# Altium PCB PCB.PcbDoc
Units mm, origin at the board's own origin, x right, y up, seen from the top; angles counter-clockwise.
Board outline 152.4 x 101.6 mm, 2 copper layers (Top Layer, Bottom Layer); 23 components, 22 nets, 137 pads, 57 vias.
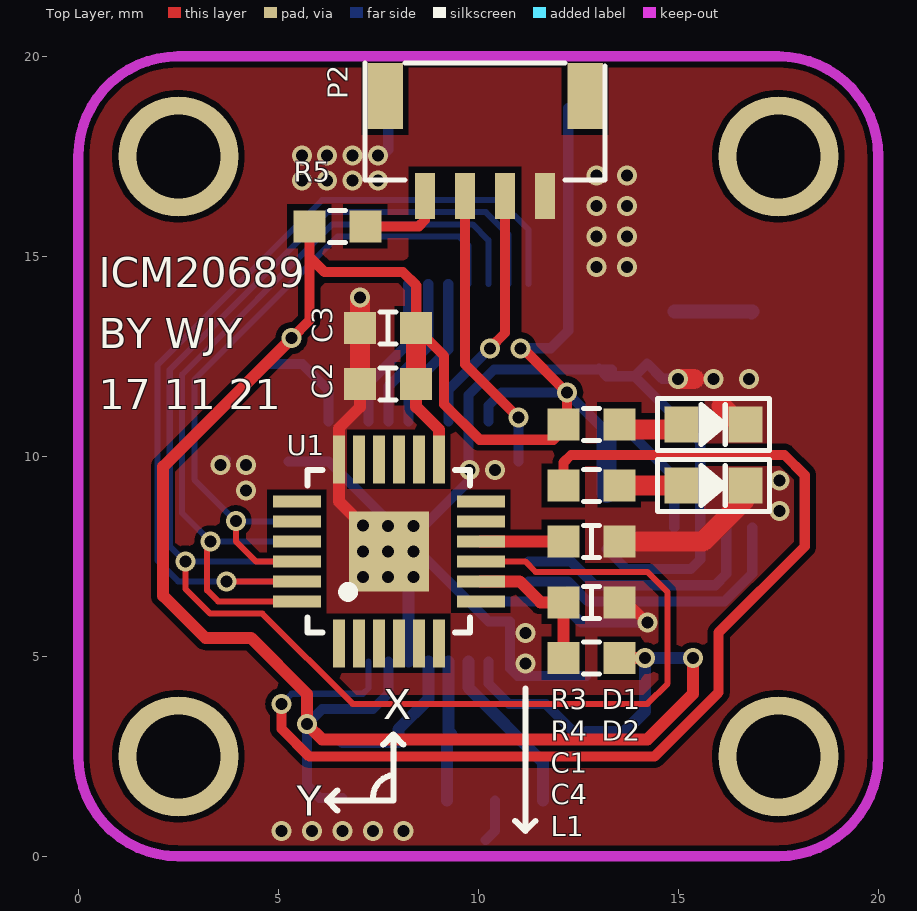
[diagram p0: Top Layer view]
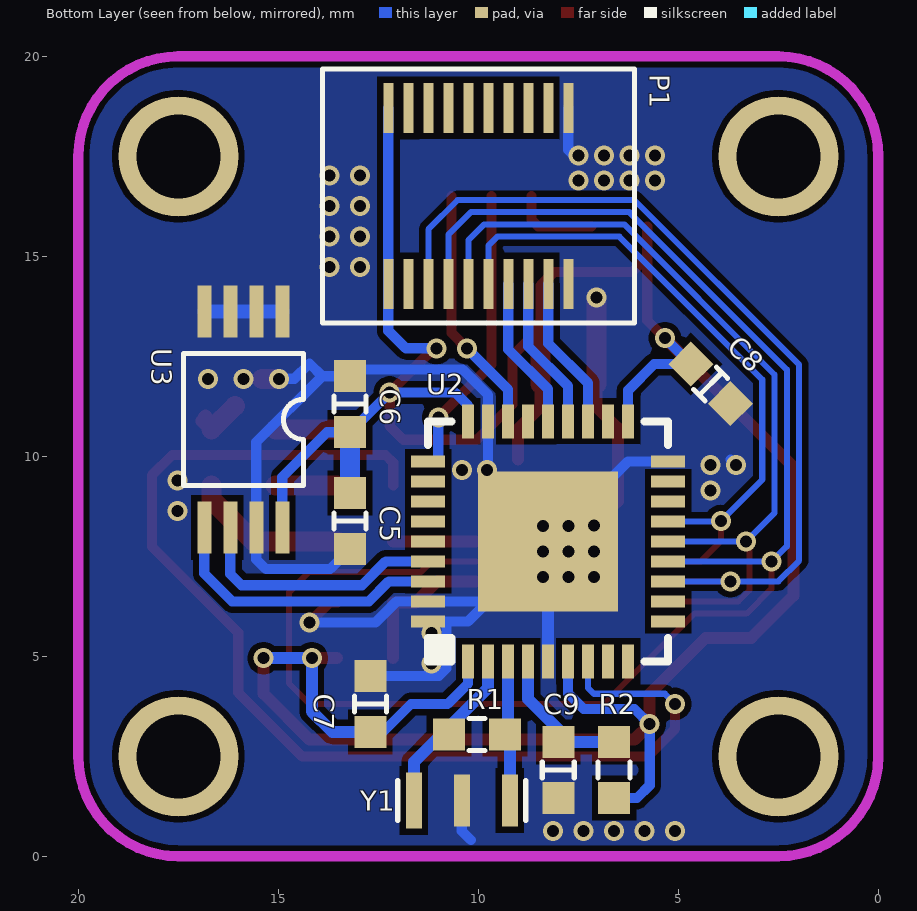
[diagram p1: Bottom Layer view, seen from below]

## Layer stack, top to bottom
Top Solder: solder mask 0.0102, Solder Resist, Dk 3.5
Top Layer: signal copper 0.0356
Dielectric 1: dielectric 0.32, FR-4, Dk 4.8
Bottom Layer: signal copper 0.0356
Bottom Solder: solder mask 0.0102, Solder Resist, Dk 3.5

## Board outline
-162.56,-6.604 -10.16,-6.604 -10.16,94.996 -162.56,94.996

## Design rules (kind name [scope] priority, off if disabled: settings)
Clearance [All] p1: gap=0.152
PlaneClearance [All] p1 off: clearance=0.508
PolygonConnect [All] p1: connectstyle=Direct reliefconductorwidth=0.254 reliefentries=4 polygonreliefangle="90 Angle" airgapwidth=0.254
RoutingVias [All] p1: holewidth=0.711 width=1.27 viastyle="Through Hole" minholewidth=0.254 minwidth=0.5 maxholewidth=0.711 maxwidth=1.27
SolderMaskExpansion [All] p1: expansion=0.102
Width [All] p1: maxlimit=2.54 minlimit=0.152 preferedwidth=0.254
29 further rules are at their usual default settings.

## Components (designator, comment, footprint, x,y, rotation, side; value= is the part's Value field where it differs from the comment)
C1 "Cap" c0603 12.827,7.874 r180 top
C2 "Cap" c0603 7.747,11.811 r180 top
C3 "Cap" c0603 7.747,13.208 r180 top
C4 "Cap" c0603 12.827,6.35 r180 top
C5 "Cap" C0603 13.208,8.382 r90 bottom
C6 "Cap" C0603 13.208,11.303 r270 bottom
C7 "Cap" C0603 12.7,3.81 r270 bottom
C8 "Cap" C0603 4.191,11.811 r45 bottom
C9 "Cap" C0603 8.001,2.159 r90 bottom
D1 "LED0" 0603D 15.875,10.795 r0 top
D2 "LED0" 0603D 15.875,9.271 r0 top
L1 "Inductors" r0603 12.827,4.953 r180 top
P1 "Header 10X2" 0.5_2x10P 10,16.51 r180 bottom
P2 "Header 4" 1.0*4PIN/SMD 8.668,16.51 r0 top
R1 "Res1" R0603 10.033,3.048 r0 bottom
R2 "Res1" R0603 6.604,2.159 r270 bottom
R3 "Res1" R0603 12.827,10.795 r180 top
R4 "Res1" R0603 12.827,9.271 r180 top
R5 "Res1" R0603 6.477,15.748 r0 top
U1 "ICM-20689" QFN24 7.761,7.624 r90 top locked
U2 "STM32F103T8U6" VFQFPN36 8.255,7.874 r90 bottom
U3 "AT24C16" TSSOP8 15.875,10.922 r270 bottom
Y1 "XTAL(3213)" Y3213 10.414,1.397 r90 bottom

## Footprints (in the part's own frame and the unit in brackets; to place one, negate y for a bottom-side part, rotate by r counter-clockwise, add the part's x,y. Pads: shape width x height; smd on the part's side, far side on the other; paste and mask are expansions set on the pad)
0.5_2x10P [mm]
  rect 0.25x1.25 smd: 1(-2.25,-2.2) 2(-2.25,2.2) 3(-1.75,-2.2) 4(-1.75,2.2) 5(-1.25,-2.2) 6(-1.25,2.2) 7(-0.75,-2.2) 8(-0.75,2.2) 9(-0.25,-2.2) 10(-0.25,2.2) 11(0.25,-2.2) 12(0.25,2.2) 13(0.75,-2.2) 14(0.75,2.2) 15(1.25,-2.2) 16(1.25,2.2) 17(1.75,-2.2) 18(1.75,2.2) 19(2.25,-2.2) 20(2.25,2.2)
  silkscreen extent -3.9,-3.18 3.9,3.18
1.0*4PIN/SMD [mm]
  rect 0.5x1.143 smd: 1(0,0) 2(1,0) 3(2,0) 4(3,0)
  rect 0.889x1.651 smd: 5(-1,2.5) 6(4,2.5)
  silkscreen extent -1.5,0.4 4.5,3.32
0603D [mm]
  rect 0.85x0.9 smd: 1(-0.8,0) 2(0.8,0)
  silkscreen extent -1.4,-0.65 1.4,0.65, body extent -0.85,-0.4 0.77,0.4, height 1.1
c0603 [mm] "C0603"
  rect 0.8x0.8 smd: 1(-0.7,0) 2(0.7,0)
  silkscreen extent -0.2,-0.4 0.2,0.4, body extent -0.75,-0.4 0.85,0.4, height 0.6
C0603 [mm] "C0603"
  rect 0.8x0.8 smd: 1(-0.7,0) 2(0.7,0)
  silkscreen extent -0.2,-0.4 0.2,0.4, body extent -0.75,-0.4 0.85,0.4, height 0.6
QFN24 [mm]
  rect 1.2x0.3 smd: 1(-2.3,1.25) 2(-2.3,0.75) 3(-2.3,0.25) 4(-2.3,-0.25) 5(-2.3,-0.75) 6(-2.3,-1.25) 13(2.3,-1.25) 14(2.3,-0.75) 15(2.3,-0.25) 16(2.3,0.25) 17(2.3,0.75) 18(2.3,1.25)
  rect 0.3x1.2 smd: 7(-1.25,-2.3) 8(-0.75,-2.3) 9(-0.25,-2.3) 10(0.25,-2.3) 11(0.75,-2.3) 12(1.25,-2.3) 19(1.25,2.3) 20(0.75,2.3) 21(0.25,2.3) 22(-0.25,2.3) 23(-0.75,2.3) 24(-1.25,2.3)
  rect 2x2 smd: 18(0,0)
  silkscreen extent -2.03,-2.03 2.03,2.03
r0603 [mm] "R0603"
  rect 0.8x0.8 smd: 1(-0.7,0) 2(0.7,0)
  silkscreen extent -0.2,-0.4 0.2,0.4, body extent -0.75,-0.4 0.85,0.4, height 0.6
R0603 [mm] "R0603"
  rect 0.8x0.8 smd: 1(-0.7,0) 2(0.7,0)
  silkscreen extent -0.2,-0.4 0.2,0.4, body extent -0.75,-0.4 0.85,0.4, height 0.6
TSSOP8 [mm]
  rect 1.3x0.35 smd: 1(-2.7,0.975) 2(-2.7,0.325) 3(-2.7,-0.325) 4(-2.7,-0.975) 5(2.7,-0.975) 6(2.7,-0.325) 7(2.7,0.325) 8(2.7,0.975)
  silkscreen extent -1.65,-1.5 1.65,1.5
VFQFPN36 [mm]
  rect 0.85x0.3 smd: 1(-3,2) 2(-3,1.5) 3(-3,1) 4(-3,0.5) 5(-3,0) 6(-3,-0.5) 7(-3,-1) 8(-3,-1.5) 9(-3,-2) 19(3,-2) 20(3,-1.5) 21(3,-1) 22(3,-0.5) 23(3,0) 24(3,0.5) 25(3,1) 26(3,1.5) 27(3,2)
  rect 0.3x0.85 smd: 10(-2,-3) 11(-1.5,-3) 12(-1,-3) 13(-0.5,-3) 14(0,-3) 15(0.5,-3) 16(1,-3) 17(1.5,-3) 18(2,-3) 28(2,3) 29(1.5,3) 30(1,3) 31(0.5,3) 32(0,3) 33(-0.5,3) 34(-1,3) 35(-1.5,3) 36(-2,3)
  rect 3.5x3.5 smd: 36(0,0)
  silkscreen extent -3,-3 3,3
Y3213 [mm]
  rect 1.4x0.4 smd: 1(0,1.2)
  rect 1.3x0.4 smd: 2(0,0) 3(0,-1.2)
  silkscreen extent -0.5,-1.6 0.5,1.6

## Part data
C1 C2 C3 C4 C5 C6 C7 C8 C9: "Capacitor"
D1 D2: "Typical INFRARED GaAs LED"
P1: "Header, 10-Pin, Dual row"
P2: "Header, 4-Pin"
R1 R2 R3 R4 R5: "Resistor"
Y1: "Crystal Oscillator"

## Free pads (board coordinates)
  round 3 hole 2.1: 0(2.5,2.5) 0(2.5,17.5) 0(17.5,2.5) 0(17.5,17.5)

## Via types
v1: diameter 0.5, hole 0.3, Top Layer to Bottom Layer, 57 vias

## Nets (pads, with @x,y where several pads share a name; then routed paths per layer and width w, separated by ;. In a path a pad name is that pad's centre, name@x,y a point inside that pad or via, vN(x,y) a via of type N, cw(c..) or ccw(c..) an arc to the next point about the centre after c; other vN are vias at no path point)
3.3V: C2.1 C3.1 C5.2 C6.2 C7.2 C8.2 L1.1 P1.1 P1.2 R2.2 R3.2 R5.1 U1.13 U2.1 U2.6 U2.19 U2.27 U3.8 | length 76.4
  Top Layer w0.254: v1(5.334,12.954) 5.777,13.397 5.777,14.986 ; R5.1 5.777,14.986 ; v1(11.049,12.7) 11.111,12.7 v1(12.214,11.597) 12.214,10.755 11.873,10.414 10.033,10.414 9.144,11.303 9.144,12.511 C3.1 8.447,14.274 8.116,14.605 6.158,14.605 5.777,14.986
  Top Layer w0.3: v1(5.334,12.954) 2.123,9.743 2.123,6.513 3.175,5.461 4.318,5.461 5.715,4.064 v1(5.715,3.302) 6.096,2.921 14.224,2.921 15.367,4.064 v1(15.367,4.953) ; C2.1 8.447,11.238 9.011,10.674 U1.13 ; L1.1 v1(14.163,4.953)
  Top Layer w0.5: C2.1 C3.1
  Bottom Layer w0.254: v1(5.334,12.954) C8.2 5.601,12.306 6.255,11.652 U2.19 ; R2.2 6.034,1.459 5.715,1.778 v1(5.715,3.302) 6.096,3.683 7.366,3.683 7.755,4.072 U2.6 ; U2.1 10.255,4.322 10.767,3.81 11.684,3.81 12.384,3.11 C7.2 ; U2.27 10.255,11.271 10.581,11.597 v1(12.214,11.597) C6.2 13.781,10.603 14.9,9.484 U3.8 ; v1(11.049,12.7) 11.811,12.7 12.25,13.139 P1.1 P1.2
  Bottom Layer w0.3: C7.2 13.651,3.11 14.163,3.622 v1(14.163,4.953) v1(15.367,4.953)
  Bottom Layer w0.5: C5.2 C6.2
3.3V_T: P2.1 R5.2 | length 2.2
  Top Layer w0.254: R5.2 8.509,15.748 8.668,15.907 P2.1
CS: P1.11 U1.22 U2.15 | length 16.9
  Top Layer w0.152: v1(3.937,8.382) 3.937,7.874 4.437,7.374 U1.22
  Bottom Layer w0.152: U2.15 3.945,8.374 v1(3.937,8.382) 2.902,9.417 2.902,11.919 6.477,15.494 9.525,15.494 9.75,15.269 P1.11
CS_STM32: P1.13 U2.23 | length 3.8
  Bottom Layer w0.254: U2.23 8.255,11.678 9.25,12.673 P1.13
GND: C1.1 C2.2 C3.2 C4.1 C5.1 C6.1 C7.1 C8.1 C9.1 D1.2 D2.2 P1.19 P1.20 P2.4 U1.18 U2.5 U2.18 U2.26 U2.35 U2.36 U3.1 U3.2 U3.3 U3.4 U3.7 Y1.2 | length 54.8
  Top Layer w0.254: C4.1 13.716,6.35 v1(14.224,5.842)
  Top Layer w0.3: C2.2 7.047,11.238 6.511,10.702 6.511,9.924 6.511,8.874 v1(7.112,8.273) U1.18@7.761,7.624
  Top Layer w0.35: D1.2@16.675,10.668 D1.2@16.891,10.884 ; D1.2 16.85,10.97 D1.2@16.826,10.994
  Top Layer w0.5: C2.2 C3.2 v1(7.047,13.97) ; C1.1 15.621,7.874 16.675,8.928 D2.2 ; v1(14.986,11.938) 15.405,11.938 ; 16.084,11.258 D1.2@16.675,10.668
  Bottom Layer w0.254: v1(3.556,9.779) v1@3.696,9.919 ; U2.18 6.255,9.874 U2.36@8.255,7.874 ; v1(7.493,17.526) 7.62,17.526 7.75,17.656 P1.20 ; 10.185,0.406 10.414,0.635 Y1.2 ; C7.1 10.984,4.51 10.795,4.699 10.795,5.874 10.255,5.874 U2.36@9.755,6.374 ; C6.1@13.019,12.192 C6.1@13.04,12.171 ; C5.1 13.706,7.184 15.312,7.184 15.55,7.422 U3.7 15.55,10.358 13.905,12.003 ; C6.1@13.335,12.171 C6.1@13.04,12.171 ; v1(14.224,5.842) 12.573,5.842 12.041,6.374 U2.35 U2.36@9.755,6.374 ; v1(14.986,11.938) 14.602,11.938 14.221,12.319 13.905,12.003 ; U2.36@8.255,7.874 U2.36@9.755,6.374 ; U2.36@8.255,7.874 9.755,9.374 U2.26 9.755,11.533 10.393,12.171 C6.1@13.04,12.171 ; C6.1@13.04,12.171 C6.1 13.905,12.003
  Bottom Layer w0.3: U2.5 U2.36@8.255,7.874
  Bottom Layer w0.35: U3.1 U3.2 U3.3 U3.4 U3.4@16.826,13.598
  other v1: 5.08,0.635 5.842,0.635 6.604,0.635 7.366,0.635 8.128,0.635 11.176,4.826 11.176,5.588 7.112,6.985 7.747,6.985 8.382,6.985 7.112,7.62 7.747,7.62 8.382,7.62 7.747,8.255 8.382,8.255 17.526,8.636 4.191,9.144 17.526,9.398 9.779,9.652 10.414,9.652 4.191,9.779 15.875,11.938 16.764,11.938 12.954,14.732 13.716,14.732 12.954,15.494 13.716,15.494 12.954,16.256 13.716,16.256 5.588,16.891 6.223,16.891 6.858,16.891 7.493,16.891 12.954,17.018 13.716,17.018 5.588,17.526 6.223,17.526 6.858,17.526
I2C_SCL: U2.33 U3.6 | length 6.5
  Bottom Layer w0.254: U2.33 12.311,7.374 12.907,6.778 15.922,6.778 16.2,7.056 U3.6
I2C_SDA: U2.34 U3.5 | length 7.2
  Bottom Layer w0.254: U2.34 12.236,6.874 12.739,6.371 16.15,6.371 16.85,7.071 U3.5
NetC1_2: C1.2 U1.10 | length 2.1
  Top Layer w0.3: U1.10 C1.2
NetC4_2: C4.2 L1.2 U1.8 | length 3.7
  Top Layer w0.3: U1.8 11.033,6.874 11.557,6.35 C4.2 L1.2
NetD1_1: D1.1 R3.1 | length 1.5
  Top Layer w0.5: R3.1@13.527,10.668 D1.1@15.075,10.668
NetD2_1: D2.1 R4.1 | length 1.5
  Top Layer w0.5: R4.1 D2.1
NRST: C9.2 R2.1 U2.4 | length 3.7
  Bottom Layer w0.3: R2.1 C9.2 8.001,3.175 8.755,3.929 U2.4
OSC_IN: R1.2 U2.2 Y1.1 | length 4.2
  Bottom Layer w0.3: U2.2 9.755,4.215 11.614,2.356 Y1.1
OSC_OUT: R1.1 U2.3 Y1.3 | length 3.6
  Bottom Layer w0.3: Y1.3 9.214,2.929 R1.1 9.255,3.126 U2.3
PA0: R4.2 U2.7 | length 28.7
  Top Layer w0.254: v1(5.08,3.81) 5.08,3.188 5.777,2.492 14.402,2.492 16.002,4.092 16.002,5.588 18.161,7.747 18.161,9.525 17.653,10.033 12.319,10.033 12.127,9.841 R4.2
  Bottom Layer w0.152: v1(5.08,3.81) 5.334,4.064 7.112,4.064 7.255,4.207 U2.7
SCLK: P1.5 U1.23 U2.12 | length 22.8
  Top Layer w0.152: v1(3.699,6.874) U1.23 U1.23@5.445,6.858
  Bottom Layer w0.152: U2.12 v1(3.699,6.874) 2.498,6.874 1.981,7.391 1.981,12.291 6.098,16.408 10.516,16.408 11.25,15.674 P1.5
SDI: P1.9 U1.24 U2.14 | length 20.5
  Top Layer w0.152: v1(3.302,7.874) 3.22,7.792 3.22,6.649 3.496,6.374 U1.24
  Bottom Layer w0.152: U2.14 v1(3.302,7.874) 2.597,8.579 2.597,12.045 6.351,15.799 9.855,15.799 10.25,15.404 P1.9
SDO: P1.7 U1.9 U2.13 | length 40.5
  Top Layer w0.152: v1(2.675,7.374) 2.675,6.689 3.295,6.069 4.599,6.069 6.858,3.81 14.224,3.81 14.732,4.318 14.732,6.604 14.224,7.112 11.43,7.112 11.168,7.374 U1.9
  Bottom Layer w0.152: U2.13 v1(2.675,7.374) 2.659,7.374 2.286,7.747 2.286,12.165 6.224,16.104 10.185,16.104 10.75,15.539 P1.7
SWCLK: P2.2 U2.28 | length 7.2
  Top Layer w0.254: P2.2 9.668,12.303 v1(11.001,10.97)
  Bottom Layer w0.254: U2.28@11.001,9.874 v1(11.001,10.97)
SWDIO: P2.3 U2.25 | length 6.2
  Top Layer w0.254: v1(10.287,12.7) 10.668,13.081 P2.3
  Bottom Layer w0.254: U2.25 9.255,11.668 v1(10.287,12.7)
USART1_RX: P1.15 U2.22 | length 3.8
  Bottom Layer w0.254: U2.22 7.755,11.752 8.75,12.747 P1.15
USART1_TX: P1.17 U2.21 | length 3.8
  Bottom Layer w0.254: U2.21 7.255,11.827 8.25,12.822 P1.17
pads on no net: P1.3 P1.4 P1.6 P1.8 P1.10 P1.12 P1.14 P1.16 P1.18 P2.5 P2.6 U1.1 U1.2 U1.3 U1.4 U1.5 U1.6 U1.7 U1.11 U1.12 U1.14 U1.15 U1.16 U1.17 U1.19 U1.20 U1.21 U2.8 U2.9 U2.10 U2.11 U2.16 U2.17 U2.20 U2.24 U2.29 U2.30 U2.31 U2.32

## Polygon pours and split planes (outlines as drawn)
GND on Bottom Layer "Top Layer-No Net" (solid, remove dead copper, pour order 6): 0,0 0.127,0.127 20.066,0.127 20.066,6.477 20.066,20.066 0,20.066
GND on Top Layer "Top Layer-No Net" (solid, remove dead copper, pour order 8): 0,20.066 0,0.127 20.193,0.127 20.193,20.066

## Keep-outs
Keep-Out Layer:
  lines w0.254: 0,2.5 ccw(c2.5,2.5) 2.5,0 17.5,0 ccw(c17.5,2.5) 20,2.5 20,17.5 ccw(c17.5,17.5) 17.5,20 2.5,20 ccw(c2.5,17.5) 0,17.5 0,2.5

## Other copper
Top Layer:
  pour cut-out: 8.266,17.234 8.255,17.223 8.255,12.7 11.049,12.7 11.07,12.721 11.07,17.234

## Silkscreen, mask and mechanical layers (free items; w line width, h text height)
Top Overlay:
  lines w0.15: 6.477,1.143 6.223,1.397 ; 6.477,1.651 6.223,1.397 ; 7.366,1.397 cw(c7.938,1.46) 7.874,2.032 ; 7.62,2.794 7.874,3.048 ; 8.128,2.794 7.874,3.048 ; 10.922,0.889 11.176,0.635 ; 11.176,4.191 11.176,0.635 ; 11.43,0.889 11.176,0.635 ; 6.223,1.397 7.874,1.397 7.874,3.048
  text "ICM20689" at 0.508,14.224 h0.75
  text "BY WJY" at 0.508,12.7 h0.75
  text "17 11 21" at 0.508,11.176 h0.75
  text "X" at 7.62,3.429 h0.75
  text "Y" at 5.461,1.016 h0.75